# Altium PCB 3923Final.PcbDoc
Units mil, origin at the board's own origin, x right, y up, seen from the top; angles counter-clockwise.
Board outline 6000 x 3475 mil, 2 copper layers (Top Layer, Bottom Layer); 68 components, 51 nets, 256 pads, 6 vias.
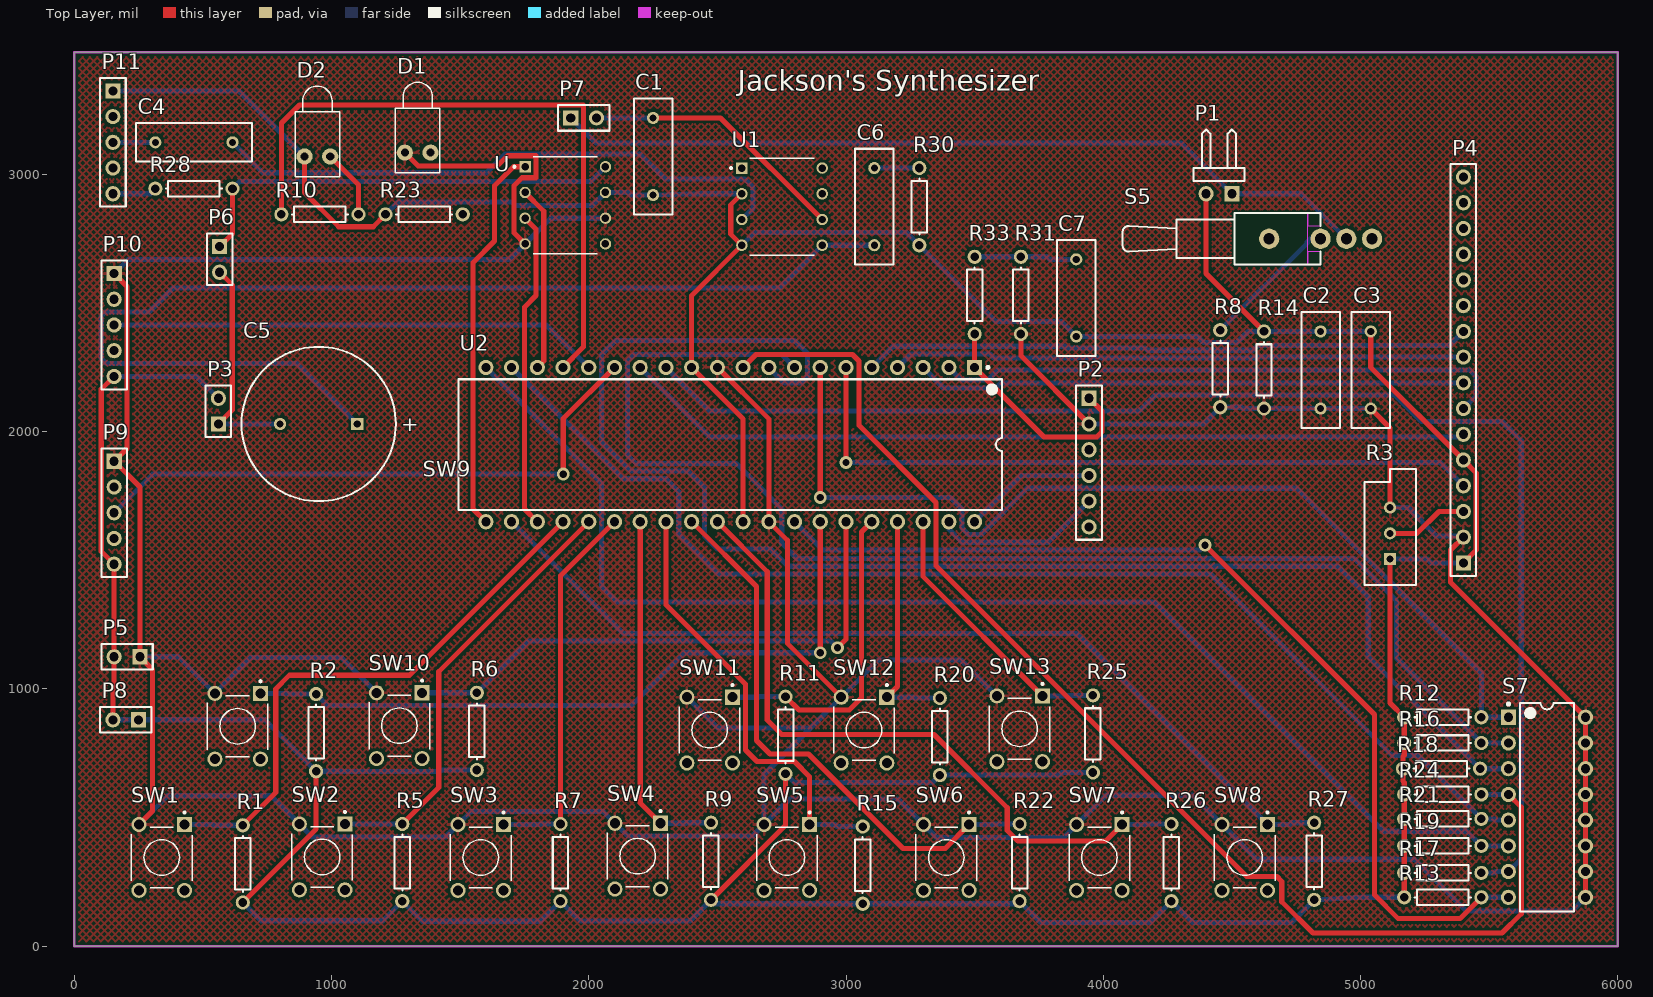
[diagram p0: Top Layer view]
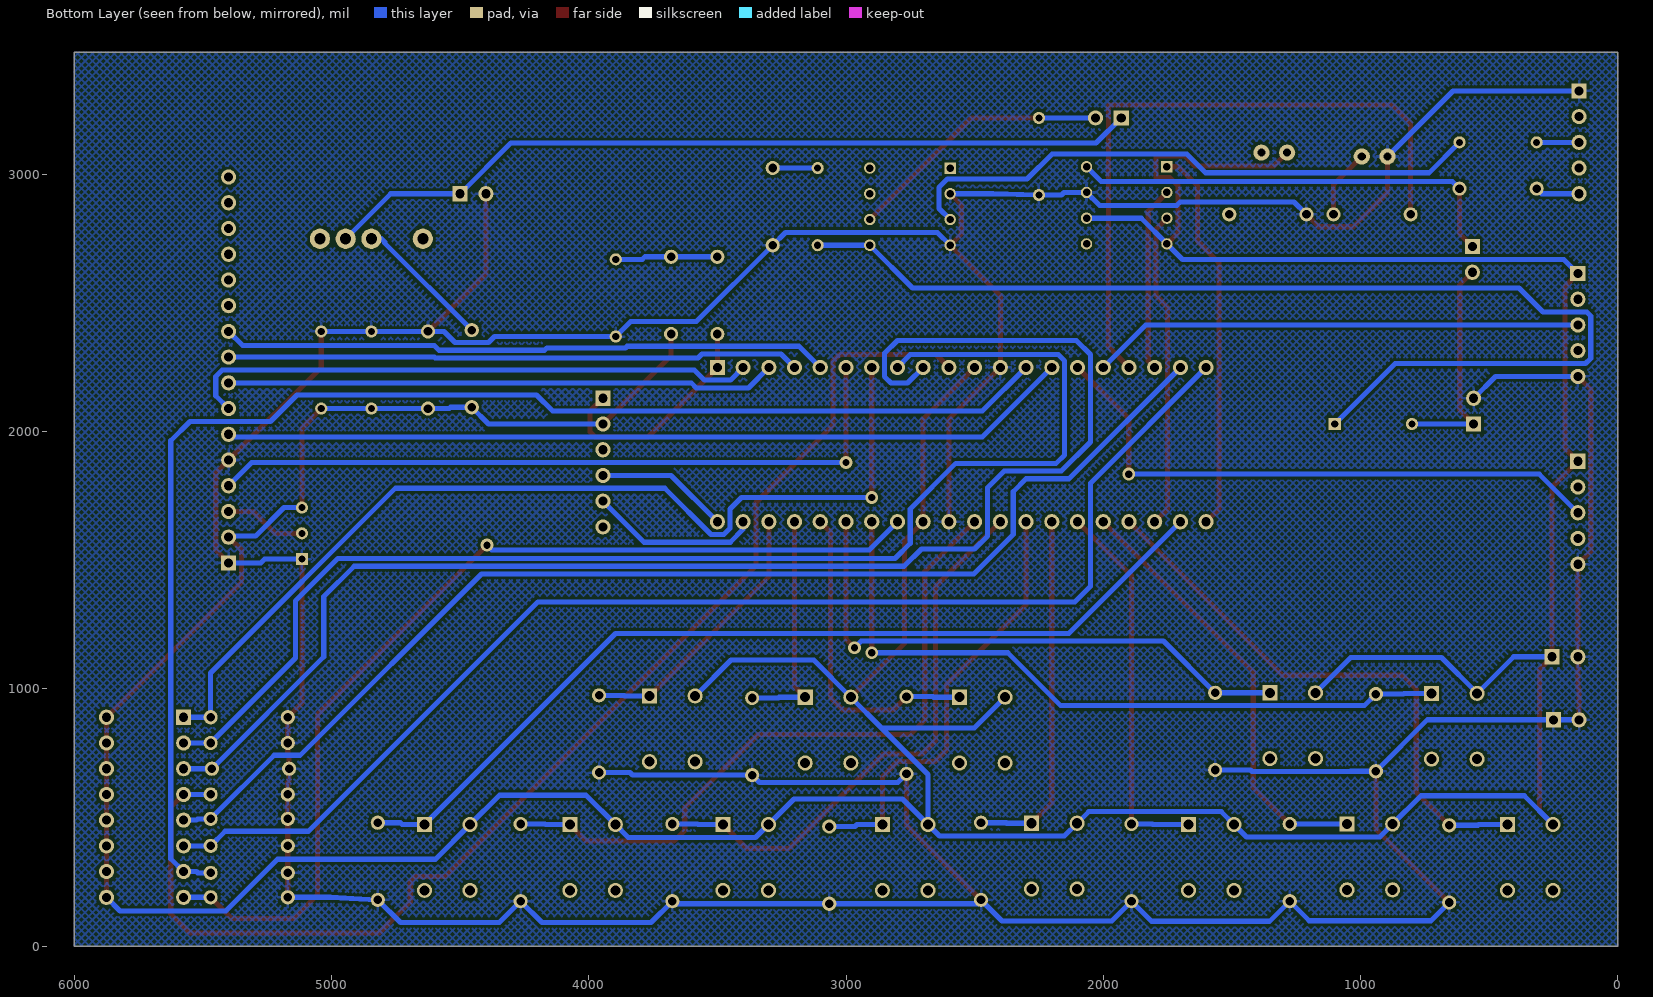
[diagram p1: Bottom Layer view, seen from below]

## Layer stack, top to bottom
Top Solder: solder mask 0.4, Solder Resist, Dk 3.5
Top Layer: signal copper 1.4
Dielectric 1: dielectric 12.6, FR-4, Dk 4.8
Bottom Layer: signal copper 1.4
Bottom Solder: solder mask 0.4, Solder Resist, Dk 3.5

## Board outline
0,0 0,3475 6000,3475 6000,0

## Design rules (kind name [scope] priority, off if disabled: settings)
Clearance [All] p1: gap=10 ignorepadtopadclearanceinfootprint=FALSE except(0: Arc-Hole Track-Hole SMDPad-Hole THPad-Hole Via-Hole Fill-Hole Poly-Hole Region-Hole Text-Hole)
PolygonConnect [All] p1: connectstyle=Relief reliefconductorwidth=10 reliefentries=4 polygonreliefangle="90 Angle" airgapwidth=10
RoutingVias [All] p1: holewidth=28 width=50 viastyle="Through Hole" minholewidth=28 minwidth=50 maxholewidth=28 maxwidth=50
SolderMaskExpansion [All] p1: expansion=4
Width [All] p1: maxlimit=20 minlimit=15 preferedwidth=20
30 further rules are at their usual default settings.

## Components (designator, comment, footprint, x,y, rotation, side; value= is the part's Value field where it differs from the comment)
C1 "Cap" RAD-0.3 2250,3070 r90 top value=0.1uF
C2 "Cap" RAD-0.3 4845,2240 r270 top value=100pF
C3 "Cap" RAD-0.3 5040,2240 r270 top value=0.1uF
C4 "Cap" RAD-0.3 465,3125 r0 top value=0.1uF
C5 "Cap Pol1" RB7.6-15 950,2030 r0 top value=270uF
C6 "Cap" RAD-0.3 3110,2875 r270 top value=0.047uF
C7 "Cap" RAD-0.3 3895,2520 r90 top value=0.1uF
D1 "LED1" LED-1 1335,3085 r90 top
D2 "LED1" LED-1 945,3070 r90 top
P1 "Header 2H" HDR1X2H 4500,2925 r180 top
P2 "Header 6" HDR1X6 3945,2130 r270 top
P3 "Header 2" HDR1X2 560,2030 r90 top
P4 "Header 16" HDR1X16 5400,1490 r90 top
P5 "Header 2" HDR1X2 255,1125 r180 top
P6 "Header 2" HDR1X2 565,2720 r270 top
P7 "Header 2" HDR1X2 1930,3220 r0 top
P8 "Header 2" HDR1X2 250,880 r180 top
P9 "Header 5" HDR1X5 155,1885 r270 top
P10 "Header 5" HDR1X5 155,2615 r270 top
P11 "Header 5" HDR1X5 150,3325 r270 top
R1 "Res1" AXIAL-0.3 655,320 r90 top value=1K
R2 "Res1" AXIAL-0.3 940,830 r270 top value=1K
R3 "RPot" VR5 5115,1605 r90 top value=1K
R5 "Res1" AXIAL-0.3 1275,325 r270 top value=1K
R6 "Res1" AXIAL-0.3 1565,835 r270 top value=1K
R7 "Res1" AXIAL-0.3 1890,325 r270 top value=1K
R8 "Res1" AXIAL-0.3 4455,2245 r90 top value=560
R9 "Res1" AXIAL-0.3 2475,330 r270 top value=1K
R10 "Res1" AXIAL-0.3 955,2845 r0 top value=1K
R11 "Res1" AXIAL-0.3 2765,820 r270 top value=1K
R12 "Res1" AXIAL-0.3 5320,890 r0 top value=1K
R13 "Res1" AXIAL-0.3 5320,190 r180 top value=1K
R14 "Res1" AXIAL-0.3 4625,2240 r270 top value=680
R15 "Res1" AXIAL-0.3 3065,315 r270 top value=1K
R16 "Res1" AXIAL-0.3 5320,790 r0 top value=1K
R17 "Res1" AXIAL-0.3 5320,285 r180 top value=1K
R18 "Res1" AXIAL-0.3 5315,690 r180 top value=1K
R19 "Res1" AXIAL-0.3 5320,390 r180 top value=1K
R20 "Res1" AXIAL-0.3 3365,815 r270 top value=1K
R21 "Res1" AXIAL-0.3 5320,495 r180 top value=1K
R22 "Res1" AXIAL-0.3 3675,325 r270 top value=1K
R23 "Res1" AXIAL-0.3 1360,2845 r180 top value=1K
R24 "Res1" AXIAL-0.3 5320,590 r180 top value=1K
R25 "Res1" AXIAL-0.3 3960,825 r270 top value=1K
R26 "Res1" AXIAL-0.3 4265,325 r270 top value=1K
R27 "Res1" AXIAL-0.3 4820,330 r270 top value=1K
R28 "Res1" AXIAL-0.3 465,2945 r0 top value=100K
R30 "Res1" AXIAL-0.3 3285,2875 r270 top value=10
R31 "Res1" AXIAL-0.3 3680,2530 r270 top value=10K
R33 "Res1" AXIAL-0.3 3500,2530 r90 top value=470
S5 "SW-SPDT" TL36WW15050 4845,2750 r180 top
S7 "SW DIP-8" DIP-16 5725,540 r0 top
SW1 "1825910-6" SW_1825910-6-4 340,345 r270 top
SW2 "1825910-6" SW_1825910-6-4 963.58,347.05 r270 top
SW3 "1825910-6" SW_1825910-6-4 1580,345 r270 top
SW4 "1825910-6" SW_1825910-6-4 2190,350 r270 top
SW5 "1825910-6" SW_1825910-6-4 2770,345 r270 top
SW6 "1825910-6" SW_1825910-6-4 3390,345 r270 top
SW7 "1825910-6" SW_1825910-6-4 3985,345 r270 top
SW8 "1825910-6" SW_1825910-6-4 4550,345 r270 top
SW9 "1825910-6" SW_1825910-6-4 635,855 r270 top
SW10 "1825910-6" SW_1825910-6-4 1263.58,857.05 r270 top
SW11 "1825910-6" SW_1825910-6-4 2470,840 r270 top
SW12 "1825910-6" SW_1825910-6-4 3070,840 r270 top
SW13 "1825910-6" SW_1825910-6-4 3675,845 r270 top
U "LTC1661IN8#PBF" DIP794W45P254L959H508Q8 1908.7,2880 r0 top
U1 "LM386N-3/NOPB" DIP794W45P254L959H508Q8 2751.3,2875 r0 top
U2 "PIC18F46K20T-I/P" PDIP600-P40 2550,1950 r270 top

## Footprints (in the part's own frame and the unit in brackets; to place one, negate y for a bottom-side part, rotate by r counter-clockwise, add the part's x,y. Pads: shape width x height; smd on the part's side, far side on the other; paste and mask are expansions set on the pad)
AXIAL-0.3 [mm] "Axial Device, Thru-Hole; 2 Leads; 0.3 in Pin Spacing"
  round 1.4 hole 0.85: 1(-3.81,0) 2(3.81,0)
  silkscreen extent -2.77,-0.76 2.77,0.76
DIP794W45P254L959H508Q8 [mm]
  rect 1.13x1.13 hole 0.74: 1(-3.97,3.81)
  round 1.13 hole 0.74: 2(-3.97,1.27) 3(-3.97,-1.27) 4(-3.97,-3.81) 5(3.97,-3.81) 6(3.97,-1.27) 7(3.97,1.27) 8(3.97,3.81)
  silkscreen extent -5.13,-4.8 3.17,4.8
DIP-16 [mm] "DIP; 16 Leads; Row Spacing 7.62 mm; Pitch 2.54 mm"
  rect 1.5x1.5 hole 0.9: 1(-3.81,8.89)
  round 1.5 hole 0.9: 2(-3.81,6.35) 3(-3.81,3.81) 4(-3.81,1.27) 5(-3.81,-1.27) 6(-3.81,-3.81) 7(-3.81,-6.35) 8(-3.81,-8.89) 9(3.81,-8.89) 10(3.81,-6.35) 11(3.81,-3.81) 12(3.81,-1.27) 13(3.81,1.27) 14(3.81,3.81) 15(3.81,6.35) 16(3.81,8.89)
  silkscreen extent -3.93,-10.3 2.65,10.31, body extent -3.6,-10.28 3.6,10.28, height 5.08
HDR1X2 [mm] "Connector; Header; 2 Position"
  rect 1.5x1.5 hole 0.9: 1(0,0)
  round 1.5 hole 0.9: 2(2.54,0)
  silkscreen extent -1.27,-1.27 3.81,1.27
HDR1X2H [mm] "Connector; Header; 2 Position; Right Angle"
  rect 1.5x1.5 hole 0.9: 1(0,0)
  round 1.5 hole 0.9: 2(2.54,0)
  silkscreen extent -1.27,-6.35 3.81,-1.27
HDR1X5 [mm] "Connector; Header; 5 Position"
  rect 1.5x1.5 hole 0.9: 1(0,0)
  round 1.5 hole 0.9: 2(2.54,0) 3(5.08,0) 4(7.62,0) 5(10.16,0)
  silkscreen extent -1.27,-1.27 11.43,1.27
HDR1X6 [mm] "Connector; Header; 6 Position"
  rect 1.5x1.5 hole 0.9: 1(0,0)
  round 1.5 hole 0.9: 2(2.54,0) 3(5.08,0) 4(7.62,0) 5(10.16,0) 6(12.7,0)
  silkscreen extent -1.27,-1.27 13.97,1.27
HDR1X16 [mm] "Connector; Header; 16 Position"
  rect 1.5x1.5 hole 0.9: 1(0,0)
  round 1.5 hole 0.9: 2(2.54,0) 3(5.08,0) 4(7.62,0) 5(10.16,0) 6(12.7,0) 7(15.24,0) 8(17.78,0) 9(20.32,0) 10(22.86,0) 11(25.4,0) 12(27.94,0) 13(30.48,0) 14(33.02,0) 15(35.56,0) 16(38.1,0)
  silkscreen extent -1.27,-1.27 39.37,1.27
LED-1 [mm] "LED; 2 Leads"
  round 1.6 hole 0.8: 1(0,1.27) 2(0,-1.27)
  silkscreen extent -2,-2.2 6.95,2.2
PDIP600-P40 [mm] "DIP, 40-Pin, Row Spacing 15.24 mm, Pitch 2.54 mm"
  rect 1.5x1.5 hole 0.9: 1(-7.62,24.13)
  round 1.5 hole 0.9: 2(-7.62,21.59) 3(-7.62,19.05) 4(-7.62,16.51) 5(-7.62,13.97) 6(-7.62,11.43) 7(-7.62,8.89) 8(-7.62,6.35) 9(-7.62,3.81) 10(-7.62,1.27) 11(-7.62,-1.27) 12(-7.62,-3.81) 13(-7.62,-6.35) 14(-7.62,-8.89) 15(-7.62,-11.43) 16(-7.62,-13.97) 17(-7.62,-16.51) 18(-7.62,-19.05) 19(-7.62,-21.59) 20(-7.62,-24.13) 21(7.62,-24.13) 22(7.62,-21.59) 23(7.62,-19.05) 24(7.62,-16.51) 25(7.62,-13.97) 26(7.62,-11.43) 27(7.62,-8.89) 28(7.62,-6.35) 29(7.62,-3.81) 30(7.62,-1.27) 31(7.62,1.27) 32(7.62,3.81) 33(7.62,6.35) 34(7.62,8.89) 35(7.62,11.43) 36(7.62,13.97) 37(7.62,16.51) 38(7.62,19.05) 39(7.62,21.59) 40(7.62,24.13)
  silkscreen extent -7.74,-26.85 6.45,26.85, body extent -7.3,-26.85 7.3,26.85, height 6.35
RAD-0.3 [mm] "Radial Cap, Thru-Hole; 2 Leads; 0.3 in Pin Spacing"
  round 1.2 hole 0.7: 1(-3.81,0) 2(3.81,0)
  silkscreen extent -5.71,-1.91 5.71,1.91
RB7.6-15 [mm] "Polarized Capacitor (Radial); 2 Leads"
  rect 1.2x1.2 hole 0.7: 1(3.81,0)
  round 1.2 hole 0.7: 2(-3.81,0)
  silkscreen extent -7.62,-7.62 7.62,7.62
SW_1825910-6-4 [mm]
  rect 1.498x1.498 hole 0.99: 1(-3.25,2.25)
  round 1.498 hole 0.99: 2(3.25,2.25) 3(-3.25,-2.25) 4(3.25,-2.25)
  silkscreen extent -4.54,-3 3,3
TL36WW15050 [mm] "Switch; 4 Leads"
  round 2 hole 1.1: 1(0,0) 2(-2.54,0) 3(-5.08,0) M(5.08,0)
  Top Layer keep-out region: 0,-1.27 0,-2.54 1.27,-2.54 1.27,-1.27
  Top Layer keep-out region: 0,2.54 0,1.27 1.27,1.27 1.27,2.54
  Top Layer keep-out region: 1.27,2.54 1.27,-2.54 8.509,-2.54 8.509,2.54
  silkscreen extent 0,-2.54 19.56,2.54
VR5 [mm] "Thru-Hole; 3 Leads"
  rect 1.2x1.2 hole 0.7: 1(-2.54,0)
  round 1.2 hole 0.7: 2(0,0) 3(2.54,0)
  silkscreen extent -5.08,-2.54 6.35,2.54

## Part data
C1 C2 C3 C4 C6 C7: "Capacitor", LatestRevisionDate=17-Jul-2002, LatestRevisionNote="Re-released for DXP Platform.", PackageDescription="Radial Cap, Thru-Hole; 2 Leads; 0.3 in Pin Spacing", PackageReference=RAD-0.3, Published=8-Jun-2000, Publisher="Altium Limited"
C5: "Polarized Capacitor (Radial)", LatestRevisionDate=17-Jul-2002, LatestRevisionNote="Re-released for DXP Platform.", PackageDescription="Polarized Capacitor (Radial); 2 Leads", PackageReference=RB7.6-15, Published=8-Jun-2000, Publisher="Altium Limited"
D1 D2: "Typical RED GaAs LED", LatestRevisionDate=08-Jul-2005, LatestRevisionNote="Mech Layer 1 removed.", PackageDescription="LED; 2 Leads", PackageReference=LED-1, Published=8-Jun-2000, Publisher="Altium Limited"
P1: "Header, 2-Pin, Right Angle", LatestRevisionDate=17-Jul-2002, LatestRevisionNote="Re-released for DXP Platform.", Publisher="Altium Limited"
P2: "Header, 6-Pin", LatestRevisionDate=17-Jul-2002, LatestRevisionNote="Re-released for DXP Platform.", Publisher="Altium Limited"
P3 P5 P6 P7 P8: "Header, 2-Pin", LatestRevisionDate=17-Jul-2002, LatestRevisionNote="Re-released for DXP Platform.", Publisher="Altium Limited"
P4: "Header, 16-Pin", LatestRevisionDate=17-Jul-2002, LatestRevisionNote="Re-released for DXP Platform.", Publisher="Altium Limited"
P9 P10 P11: "Header, 5-Pin", LatestRevisionDate=17-Jul-2002, LatestRevisionNote="Re-released for DXP Platform.", Publisher="Altium Limited"
R1 R2 R5 R6 R7 R8 R9 R10 R11 R12 R13 R14 R15 R16 R17 R18 R19 R20 R21 R22 R23 R24 R25 R26 R27 R28 R30 R31 R33: "Resistor", LatestRevisionDate=17-Jul-2002, LatestRevisionNote="Re-released for DXP Platform.", PackageDescription="Axial Device, Thru-Hole; 2 Leads; 0.3 in Pin Spacing", PackageReference=AXIAL-0.3, Published=8-Jun-2000, Publisher="Altium Limited"
R3: "Potentiometer", LatestRevisionDate=17-Jul-2002, LatestRevisionNote="Re-released for DXP Platform.", PackageDescription="Variable Resistor, Thru-Hole; 3 Leads", PackageReference=VR5, Published=8-Jun-2000, Publisher="Altium Limited", Set Position=0.5, Sim Note="Enter the Resistance value and the set point into parameter fields."
S5: "SPDT Subminiature Toggle Switch, Right Angle Mounting, Vertical Actuation", ComponentLink1Description="Manufacturer Link", ComponentLink1URL=http://www.apem.com, DatasheetVersion=05-Dec-2000, LatestRevisionDate=17-Dec-2003, LatestRevisionNote="Schematic revised, PCB Footprint replaced.", PackageDescription="Switch; 4 Leads", PackageReference=TL36WW15050, Published=24-Mar-1999, Publisher="Altium Limited"
S7: "DIP Switch, 8 Position, SPST", LatestRevisionDate=17-Jul-2002, LatestRevisionNote="Re-released for DXP Platform.", PackageDescription="DIP Switch; 16 Leads", PackageReference=DIP_SW_8WAY_SMD, Published=24-Mar-1999, Publisher="Altium Limited"
SW1 SW2 SW3 SW4 SW5 SW6 SW7 SW8 SW9 SW10 SW11 SW12 SW13: "Switch Push Button OFF _ON_ SPST Round Button 0.05A 24VDC Momentary Contact PC Pins Thru-Hole", Contact_Current_Rating="50 mA", Package=None, Configuration_Pole-Throw="Single Pole - Single Throw", Digi-Key_Part_Number=450-1650-ND, Digi-Key_Purchase_URL=https://www.digikey.com/product-detail/en/te-connectivity-alcoswitch-switches/1825910-6/450-1650-ND/1632536?utm_source=snapeda&utm_medium=aggregator&utm_campaign=symbol, EU_RoHS_Compliance=Compliant, MF="TE Connectivity", MP=1825910-6, SnapEDA_Link=https://www.snapeda.com/parts/1825910-6/TE%20Connectivity%20ALCOSWITCH%20Switches/view-part/424522/?ref=snap, TE_purchase_URL=https://www.te.com/usa-en/product-1825910-6.html?te_bu=Cor&te_type=disp&te_campaign=seda_glo_cor-seda-global-disp-prtnr-fy19-seda-model-bom-cta_sma-317_1&elqCampaignId=32493
U: "10 Bit Digital to Analog Converter 2 8-PDIP", Package="PDIP -8 Analog Devices", Availability=Unavailable, DigiKey-Purchase-URL=https://snapeda.com/shop?store=DigiKey&id=3218300, MF="Linear Technology/Analog Devices", Mouser-Purchase-URL=https://snapeda.com/shop?store=Mouser&id=3218300, MP=LTC1661IN8#PBF, Price=None, SnapEDA_Link=https://www.snapeda.com/parts/LTC1661IN8%23PBF/Analog%20Devices/view-part/3218300/?ref=snap
U1: Package=None, Availability=Unavailable, MP=LM386N-3/NOPB, Price=None
U2: "Flash Microcontroller with 10-Bit A/D and nanoWatt Technology, 32K Flash, 40-Pin PDIP, Industrial Temperature Range, Tape and Reel", ComponentLink1Description="Manufacturer URL", ComponentLink1URL=http://www.microchip.com/, ComponentLink2Description=Datasheet, ComponentLink2URL=http://ww1.microchip.com/downloads/en/DeviceDoc/41303F.pdf, ComponentLink3Description="Package Specification", ComponentLink3URL=http://www.microchip.com/stellent/groups/techpub_sg/documents/packagingspec/en012702.pdf, DatasheetVersion="revF, Sep-2009", PackageDescription="40-Lead Plastic Dual In-Line (P) - 600 mil Body [PDIP]", PackageReference=PDIP600-P40, PackageVersion="revBB, Aug-2009"

## Via types
v1: diameter 50, hole 28, Top Layer to Bottom Layer, 6 vias

## Nets (pads, with @x,y where several pads share a name; then routed paths per layer and width w, separated by ;. In a path a pad name is that pad's centre, name@x,y a point inside that pad or via, vN(x,y) a via of type N, cw(c..) or ccw(c..) an arc to the next point about the centre after c; other vN are vias at no path point)
9V: P1.1 P7.1 S5.2 | length 3209.7
  Bottom Layer w20: P7.1 2028,3122 4303,3122 P1.1 4770,2925 S5.2
A: R22.1 SW6.1 U2.29 | length 2190.7
  Top Layer w20: U2.29 2652,1398 2652,800 2704.44,747.56 2854.44,747.56 3222,380 3385.63,380 SW6.1
  Bottom Layer w20: SW6.1 3575,472.95 3577.05,475 R22.1
A#: R25.1 SW13.1 U2.38 | length 1066.3
  Top Layer w20: U2.38 3300,1436.53 SW13.1
  Bottom Layer w20: SW13.1 3860,972.95 3862.05,975 R25.1
AMP1: P9.3 U2.15 | length 2305.6
  Top Layer w20: v1(1901,1835) 1901,2051 U2.15
  Bottom Layer w20: P9.3 305,1835 v1(1901,1835)
AMP2: P10.3 U2.16 | length 1913.3
  Bottom Layer w20: P10.3 1835,2415 U2.16
B: R26.1 SW7.1 U2.30 | length 2695.9
  Top Layer w20: U2.30 2694,1456 2694,879 2750,823 3342,823 3627,538 3627,450 3668,409 4009.63,409 SW7.1
  Bottom Layer w20: SW7.1 4168,472.95 4170.05,475 R26.1
C#: R2.1 SW9.1 U2.34 | length 2790.6
  Top Layer w20: v1(2900,1141) U2.34
  Bottom Layer w20: SW9.1 830,982.95 832.95,980 R2.1 985,935 2165,935 2371,1141 v1(2900,1141)
CH: R27.1 SW8.1 U2.22 | length 3610.5
  Bottom Layer w20: U2.22 2134,1216 3895.53,1216 SW8.1 4725,472.95 4732.05,480 R27.1
CL: R1.2 SW1.1 U2.24 | length 2196.9
  Top Layer w20: R1.2 783,598 783,1000 836,1053 1303,1053 U2.24
  Bottom Layer w20: SW1.1 540,472.95 542.95,470 R1.2
CS: U2.21 U.1 | length 1510.6
  Top Layer w20: U2.21 1550,1700 1550,2657 1634,2741 1634,2956.09 1707.91,3030 U.1
D: R5.1 SW2.1 U2.25 | length 1698.1
  Top Layer w20: R5.1 1417,617 1417,1067 U2.25
  Bottom Layer w20: SW2.1 R5.1
D0: P4.7 U2.2 | length 2243
  Bottom Layer w20: U2.2 3449.53,2200.47 3550,2200.47 3589.53,2240 5425,2240 5450,2215 5450,2140 P4.7
D1: P4.8 U2.3 | length 2141
  Bottom Layer w20: U2.3 3379.53,2170.47 3582,2170.47 3601.53,2190 P4.8
D2: P4.9 U2.4 | length 2229.8
  Bottom Layer w20: U2.4 3252.44,2302.44 3559.56,2302.44 3575.5,2286.5 4597,2286.5 4600.5,2290 P4.9
D3: P4.10 U2.5 | length 2371.2
  Bottom Layer w20: U2.5 3182.44,2332.44 3850.56,2332.44 3857,2326 4163,2326 4172.5,2316.5 4582,2316.5 4600.5,2335 5345,2335 P4.10
D#: R6.1 SW10.1 U2.35 | length 2212.6
  Top Layer w20: v1(2967,1159.96) 3000,1192.96 U2.35
  Bottom Layer w20: SW10.1 R6.1 1766,1186 2940.96,1186 v1(2967,1159.96)
E: R7.1 SW3.1 U2.26 | length 1484.3
  Top Layer w20: R7.1 1890,1440 U2.26
  Bottom Layer w20: SW3.1 1807.45,472.95 1809.5,475 R7.1
EN: P4.6 U2.14 | length 3321.8
  Bottom Layer w20: U2.14 2470,1980 5400,1980 P4.6
F: R9.1 SW4.1 U2.27 | length 1401.9
  Top Layer w20: U2.27 2200,556.53 SW4.1
  Bottom Layer w20: SW4.1 2375,477.95 2377.05,480 R9.1
F#: R11.1 SW11.1 U2.36 | length 1244.5
  Top Layer w20: R11.1 2817,918 3012.5,918 3060,965.5 3060,1610 U2.36
  Bottom Layer w20: SW11.1 2660,967.95 2662.05,970 R11.1
G: R15.1 SW5.1 U2.28 | length 1703.4
  Top Layer w20: U2.28 2300,1327 2609,1018 2609,763 2654.44,717.56 2800,717.56 2858.58,658.98 SW5.1
  Bottom Layer w20: SW5.1 2957,472.95 2964.95,465 R15.1
G#: R20.1 SW12.1 U2.37 | length 906.8
  Top Layer w20: SW12.1 3200,1009.37 U2.37
  Bottom Layer w20: SW12.1 3260,967.95 3262.95,965 R20.1
GND: C1.1 C2.1 C3.1 C7.1 D2.1 P1.2 P3.2 P4.1 P4.5 P5.2 P8.1 P8.2 P9.5 P10.5 P11.1 R1.1 R2.2 R3.1 R5.2 R6.2 R7.2 R9.2 R11.2 R12.1 R13.2 R14.1 R15.2 R16.1 R17.2 R18.2 R19.2 R20.2 R21.2 R22.2 R23.2 R24.2 R25.2 R26.2 R27.2 R30.2 U1.2 U1.4 U2.12 U2.31 U.7 | length 20942.6
  Top Layer w20: P8.2 150,1000 155,1005 P5.2 P9.5 105,1535 105,2165 P10.5 ; R1.1 940,455 R2.2 ; D2.1 895,2930 1028,2797 1162,2797 R23.2 ; R9.2 2765,470 R11.2 ; U1.2 2552,2882 2552,2768 U1.4 2400,2530 U2.12 2600,2050 U2.31 ; P1.2 4400,2615 R14.1 ; C3.1 5040,2250 P4.5 5450,1840 5450,1540 P4.1 ; R3.1 5115,945 R12.1 R16.1 5170,742 5165,737 R18.2 5165,642 5170,637 R24.2 R21.2 R19.2 R17.2 R13.2
  Bottom Layer w20: P8.2 P8.1 740,880 R2.2 1038,680 1039,679 1422,679 1428,685 R6.2 ; P11.1 640,3325 D2.1 ; P10.5 475,2215 P3.2 ; R1.1 726,99 1199,99 R5.2 1353,97 1812,97 R7.2 1967,98 2393,98 R9.2 2490,165 R15.2 3665,165 R22.2 3758,92 4182,92 R26.2 4348,92 4732,92 R27.2 5005,190 R13.2 ; R23.2 1258,2893 1701,2893 1714,2880 2015,2880 U.7 2152,2930 2162,2920 C1.1 2428,2925 U1.2 ; U1.4 2645,2775 3235,2775 R30.2 3582,2428 3837,2428 C7.1 4366.5,2370 4390,2346.5 4519.5,2346.5 4563,2390 R14.1 C2.1 C3.1 ; R11.2 2799,636 3336,636 R20.2 3830,665 3840,675 R25.2 ; R3.1 5260,1505 5275,1490 P4.1
misc1: R21.1 S7.5 U2.19 | length 4701.8
  Bottom Layer w20: U2.19 2133,1817 2300,1817 2350,1767 2350,1600 2503,1447 4417,1447 5122,742 5223,742 R21.1 5520,495 5525,490 S7.5
misc2: R19.1 S7.6 U2.20 | length 4980.3
  Bottom Layer w20: U2.20 2050,1800 2050,1399 2111,1338 4198,1338 5089,447 5413,447 R19.1 S7.6
misc3: R17.1 S7.7 U2.13 | length 5298
  Bottom Layer w20: U2.13 2470,2080 4140,2080 4203,2143 5134,2143 5237,2040 5550,2040 5625,1965 5625,340 S7.7 5525,290 5520,285 R17.1
misc4: R13.1 S7.8 U2.33 | length 3874.5
  Top Layer w20: v1(4396,1559) 5054,901 5054,200 5147,107 5387,107 R13.1
  Bottom Layer w20: U2.33 2909.53,1540.47 4377.47,1540.47 v1(4396,1559) ; R13.1 S7.8
NetC4_1: C4.1 P11.3 | length 165
  Bottom Layer w20: P11.3 C4.1
NetC4_2: C4.2 U1.3 | length 2298.8
  Bottom Layer w20: C4.2 733,3007 1602,3007 1675,3080 2198,3080 2296,2982 2606,2982 2638,2950 2638,2868 U1.3
NetC5_1: C5.1 C6.2 U1.5 | length 4384.5
  Bottom Layer w20: C5.1 865,2265 125,2265 105,2285 105,2450 120,2465 290,2465 384,2559 2741.6,2559 U1.5 C6.2
NetC6_1: C6.1 R30.1 | length 175
  Bottom Layer w20: C6.1 R30.1
NetC7_2: C7.2 R31.1 R33.2 | length 399.1
  Bottom Layer w20: R33.2 R31.1 3782,2680 3792,2670 C7.2
NetD2_2: D2.2 R10.2 | length 270.6
  Top Layer w20: D2.2 1105,2960 R10.2
NetP4_3: P4.3 R3.2 | length 320.2
  Top Layer w20: R3.2 5220,1605 5305,1690 P4.3
NetP11_5: P11.5 R28.1 | length 173.3
  Bottom Layer w20: P11.5 295,2925 R28.1
NetR8_2: R8.2 S5.1 | length 539.7
  Bottom Layer w20: R8.2 4793,2733 4793,2737.5 4805.5,2750 S5.1
OPAMPPWR: C1.2 P7.2 U1.6 | length 1041.2
  Top Layer w20: C1.2 2512.6,3220 U1.6
  Bottom Layer w20: P7.2 C1.2
OUT: P6.1 R28.2 U.8 | length 1730.9
  Top Layer w20: P6.1 615,2770 R28.2
  Bottom Layer w20: R28.2 643,2973 2008,2973 U.8
Peak: R10.1 U2.17 | length 2612.1
  Top Layer w20: R10.1 805,3200 875,3270 1980,3270 1980,2330 U2.17
PGC: P2.5 U2.39 | length 661.3
  Bottom Layer w20: U2.39 3400,1620.47 3450,1570.47 3785.47,1570.47 P2.5
PGD: P2.4 U2.40 | length 519.6
  Bottom Layer w20: U2.40 3680,1830 P2.4
RS: P4.4 U2.6 | length 2807.3
  Top Layer w20: v1(3000,1880) U2.6
  Bottom Layer w20: v1(3000,1880) 5310,1880 P4.4
SCL: U2.18 U.2 | length 720.4
  Top Layer w20: U.2 1825,2857.4 1825,2275 U2.18
SDA: U2.23 U.3 | length 1237
  Top Layer w20: U.3 1795,2787.4 1795,2529 1750,2484 1750,1700 U2.23
SPEAKER: C5.2 P3.1 P6.2 | length 872.7
  Top Layer w20: P3.1 614,2084 614,2571 P6.2
  Bottom Layer w20: P3.1 C5.2
Vcc: C2.2 C3.2 D1.1 P2.2 P4.2 P5.1 P9.1 P10.1 R3.3 R8.1 R14.2 R31.2 S7.9 S7.10 S7.11 S7.12 S7.13 S7.14 S7.15 S7.16 SW1.3 SW2.3 SW3.3 SW4.3 SW5.3 SW6.3 SW7.3 SW8.3 SW9.3 SW10.3 SW11.3 SW12.3 SW13.3 U2.11 U2.32 U.4 U.6 | length 19872.4
  Top Layer w20: P10.1 205,2565 205,1935 P9.1 255,1785 P5.1 304,1076 304,525.53 SW1.3 ; D1.1 1337,3033 1644,3033 1684,3073 1795,3073 1795,2987.5 1740.25,2987.5 1710,2957.25 1710,2772.4 U.4 ; U2.11 2700,2050 U2.32 2772,1578 2772,1177.37 SW12.3 ; R31.2 3680,2295 P2.2 ; C3.2 5115,2015 R3.3 ; P4.2 5350,1540 5350,1415 S7.16 S7.15 S7.14 S7.13 S7.12 S7.11 S7.10 S7.9
  Bottom Layer w20: P10.1 210,2670 1692.4,2670 U.4 1852.4,2830 U.6 ; SW1.3 363.47,585 765,585 SW2.3 925,425 1443.47,425 SW3.3 1541.47,523 2056.37,523 SW4.3 2151.37,428 2636.47,428 SW5.3 ; P5.1 404.37,1125 SW9.3 685.47,1122 1038,1122 SW10.3 ; SW11.3 2501.37,848 2861.47,848 ; SW13.3 3447.37,1112 3125.47,1112 SW12.3 2861.47,848 ; P2.2 4390,2030 R8.1 4537,2095 4542,2090 R14.2 C2.2 C3.2 ; R3.3 5185,1705 5295,1595 5395,1595 P4.2 ; S7.9 5822,137 5411,137 5210,338 4596.37,338 SW8.3 4347.37,587 4010.47,587 SW7.3 3846.47,423 3351.37,423 SW6.3 3202.37,572 2780.47,572 SW5.3 ; SW5.3 2681.42,667.95 2861.47,848
Vpp: P2.1 R33.1 U2.1 | length 895.8
  Top Layer w20: R33.1 U2.1 3770,1980 3975,1980 3995,2000 3995,2080 P2.1
wav_sel10: R12.2 S7.1 U2.7 | length 3828.2
  Top Layer w20: v1(2900,1744) U2.7
  Bottom Layer w20: v1(2900,1744) 3406.47,1744 3450.47,1700 3450.47,1625 3475,1600.47 3525,1600.47 3704.53,1780 4752,1780 5470,1062 R12.2 S7.1
wav_sel11: R16.2 S7.2 U2.8 | length 5143.8
  Bottom Layer w20: U2.8 2750,2300 2175,2300 2150,2275 2150,1910 2183,1877 2573,1877 2750,1700 2750,1566 2809,1507 4975.5,1507 5140,1342.5 5140,1120 R16.2 S7.2
wav_sel20: R18.1 S7.3 U2.9 | length 5758.4
  Bottom Layer w20: U2.9 2761,2189 2825,2189 2850,2214 2850,2305 2800,2355 2105,2355 2050,2300 2050,1960 2163,1847 2385,1847 2450,1782 2450,1594 2500,1544 2707,1544 2774,1477 4912,1477 5030,1359 5030,1125 R18.1 S7.3
wav_sel21: R24.1 S7.4 U2.10 | length 4934.9
  Top Layer w20: U2.10 2650,2300 3025,2300 3050,2275 3050,2025 3350,1725 3350,1479 4558,271 4675,271 4694,252 4694,173 4816,51 5550,51 5625,126 5625,540 S7.4
  Bottom Layer w20: R24.1 S7.4
pads on no net: D1.2 P2.3 P2.6 P4.11 P4.12 P4.13 P4.14 P4.15 P4.16 P9.2 P9.4 P10.2 P10.4 P11.2 P11.4 R23.1 S5.3 S5.M SW1.2 SW1.4 SW2.2 SW2.4 SW3.2 SW3.4 SW4.2 SW4.4 SW5.2 SW5.4 SW6.2 SW6.4 SW7.2 SW7.4 SW8.2 SW8.4 SW9.2 SW9.4 SW10.2 SW10.4 SW11.2 SW11.4 SW12.2 SW12.4 SW13.2 SW13.4 U1.1 U1.7 U1.8 U.5

## Polygon pours and split planes (outlines as drawn)
GND on Bottom Layer (hatched 45Degree grid 20 track 8, pour order 12): 0,0 0,3475 6000,3475 6000,0
Vcc on Top Layer (hatched 45Degree grid 20 track 8, pour order 16): 0,0 0,3475 6000,3475 6000,0

## Keep-outs
Top Layer:
  the board outline again, w10

## Silkscreen, mask and mechanical layers (free items; w line width, h text height)
Top Overlay:
  text "Jackson's Synthesizer" at 2580,3325 h80

## Text inside footprints (layer, text, board x,y; h text height)
C5: Top Overlay "+" at 1270.15,2000.99 h59.06